# Altium PCB SixAxR.PcbDoc
Units mm, origin at the board's own origin, x right, y up, seen from the top; angles counter-clockwise.
Board outline 30 x 35 mm, 4 copper layers (Component Side, GND, +3.3, Solder Side), stack 0.844 mm thick; 99 components, 58 nets, 317 pads, 149 vias.
Unrouted connection lines stored in the file: 7.
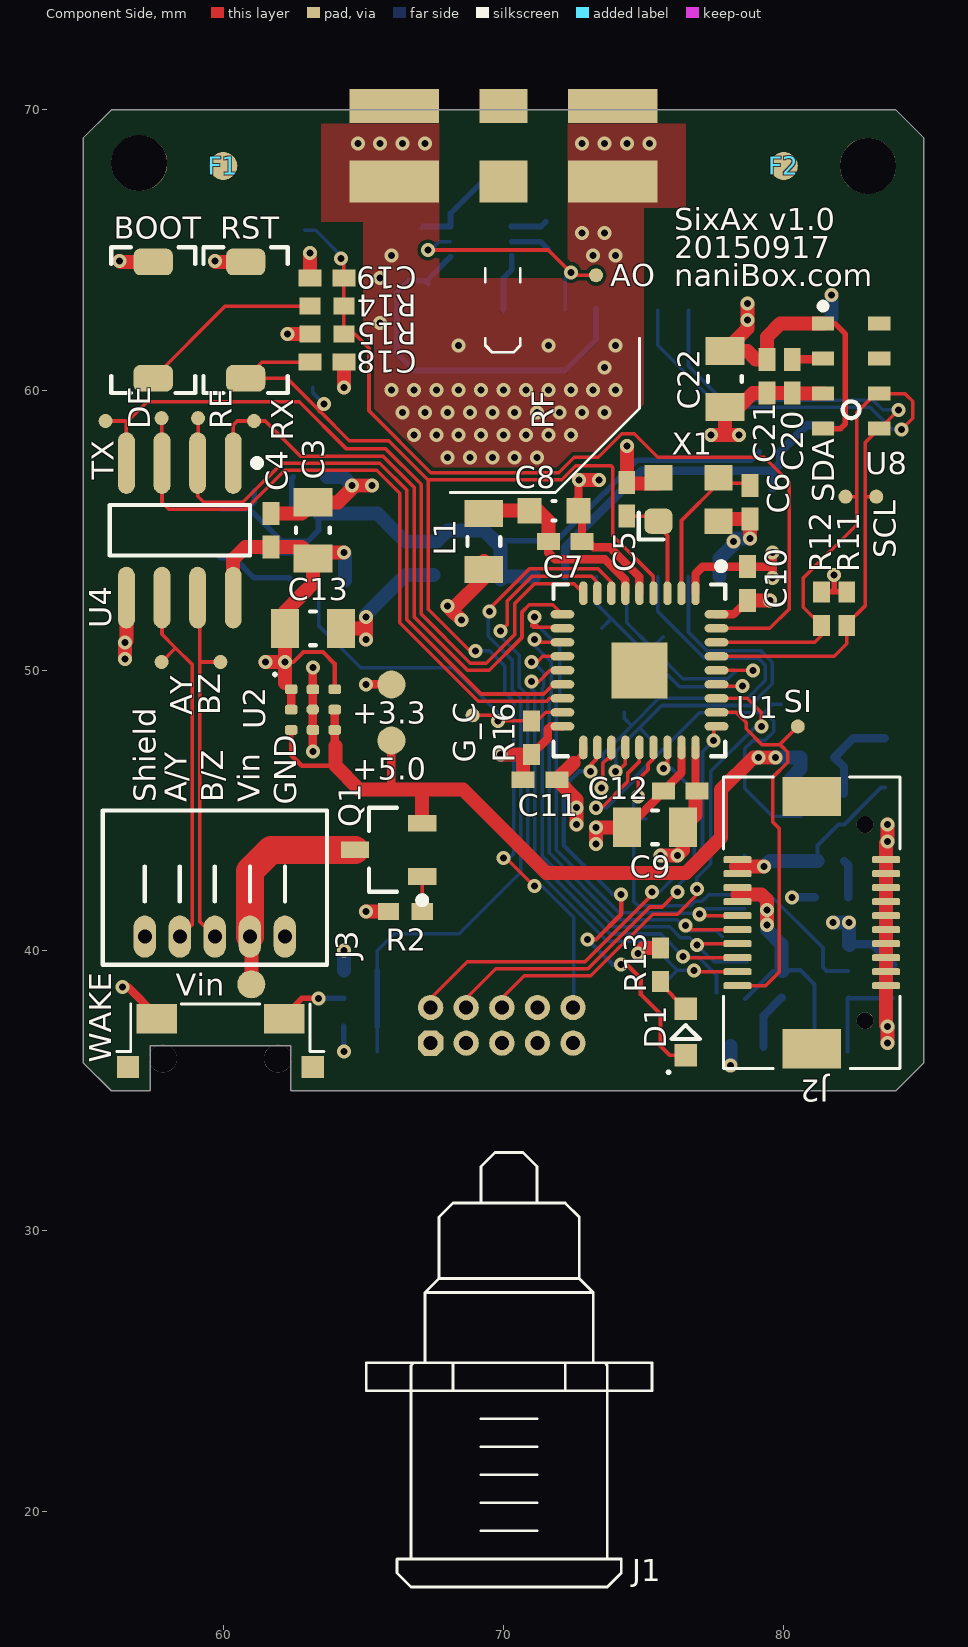
[diagram p0: Component Side view]
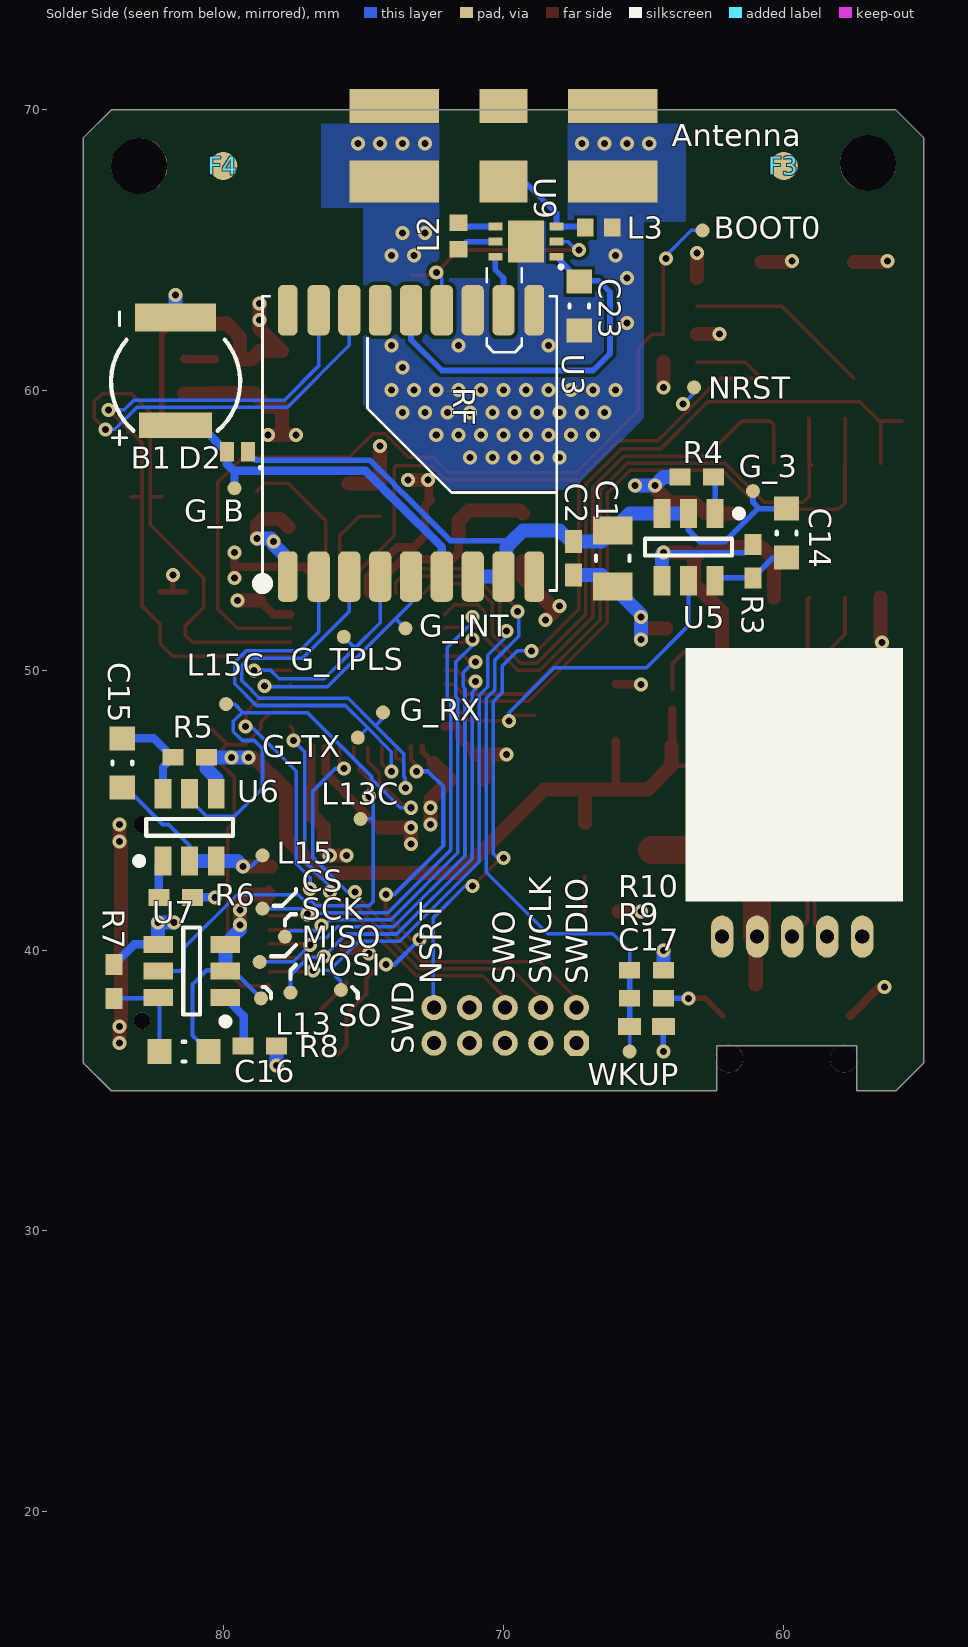
[diagram p1: Solder Side view, seen from below]
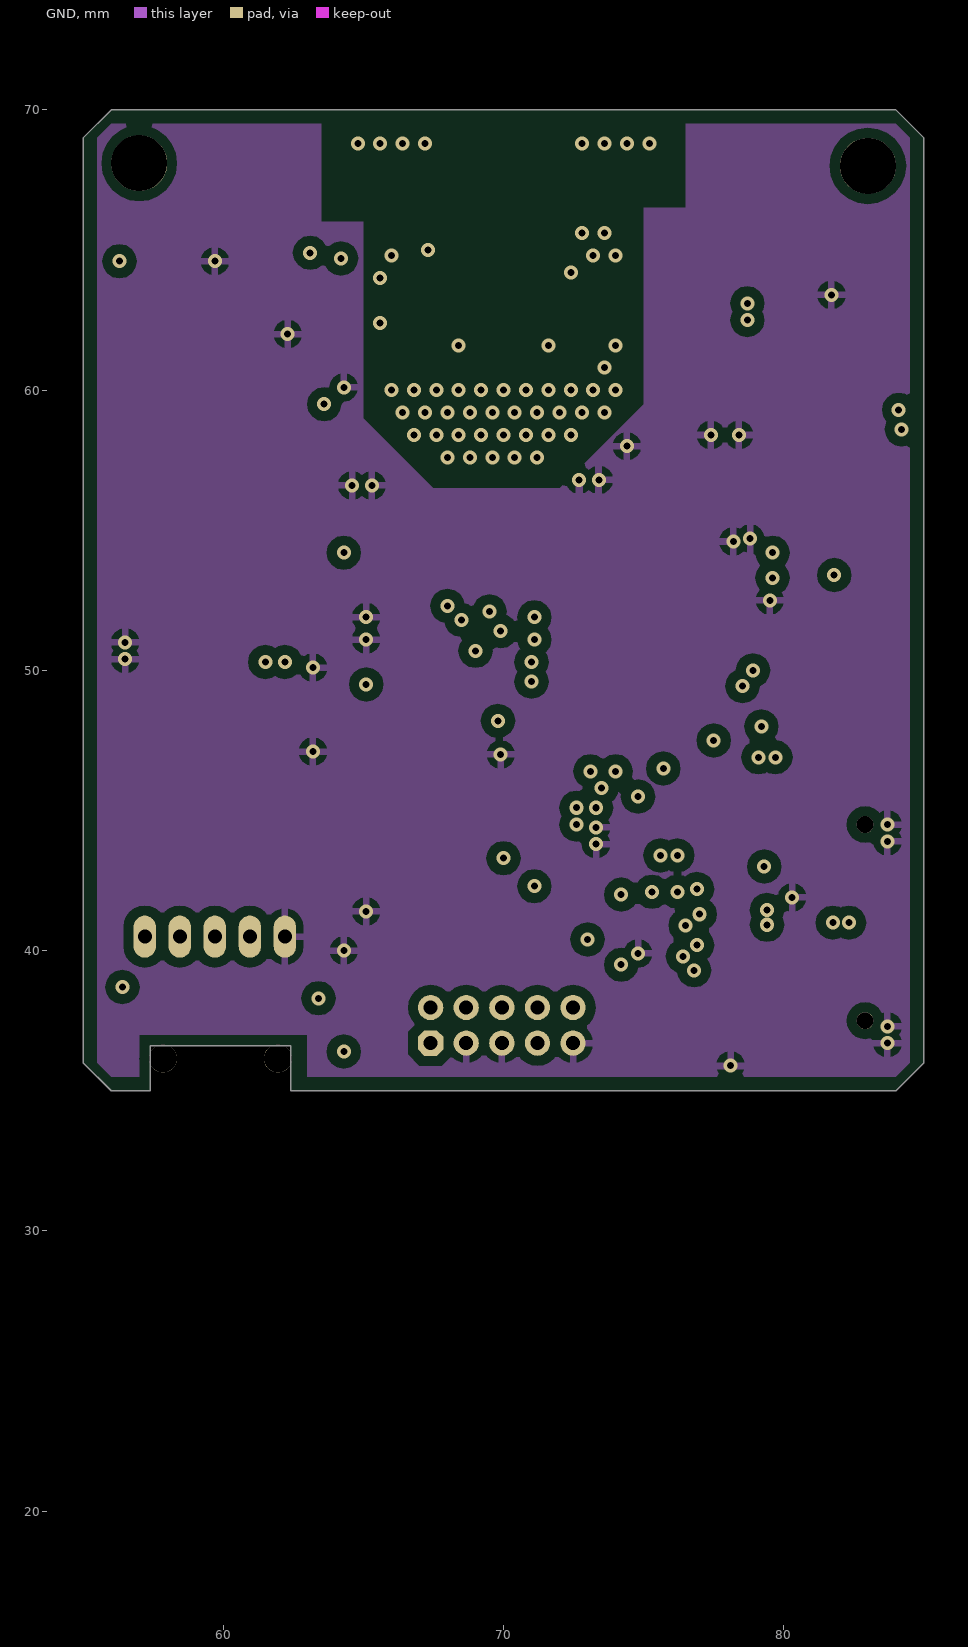
[diagram p2: GND]
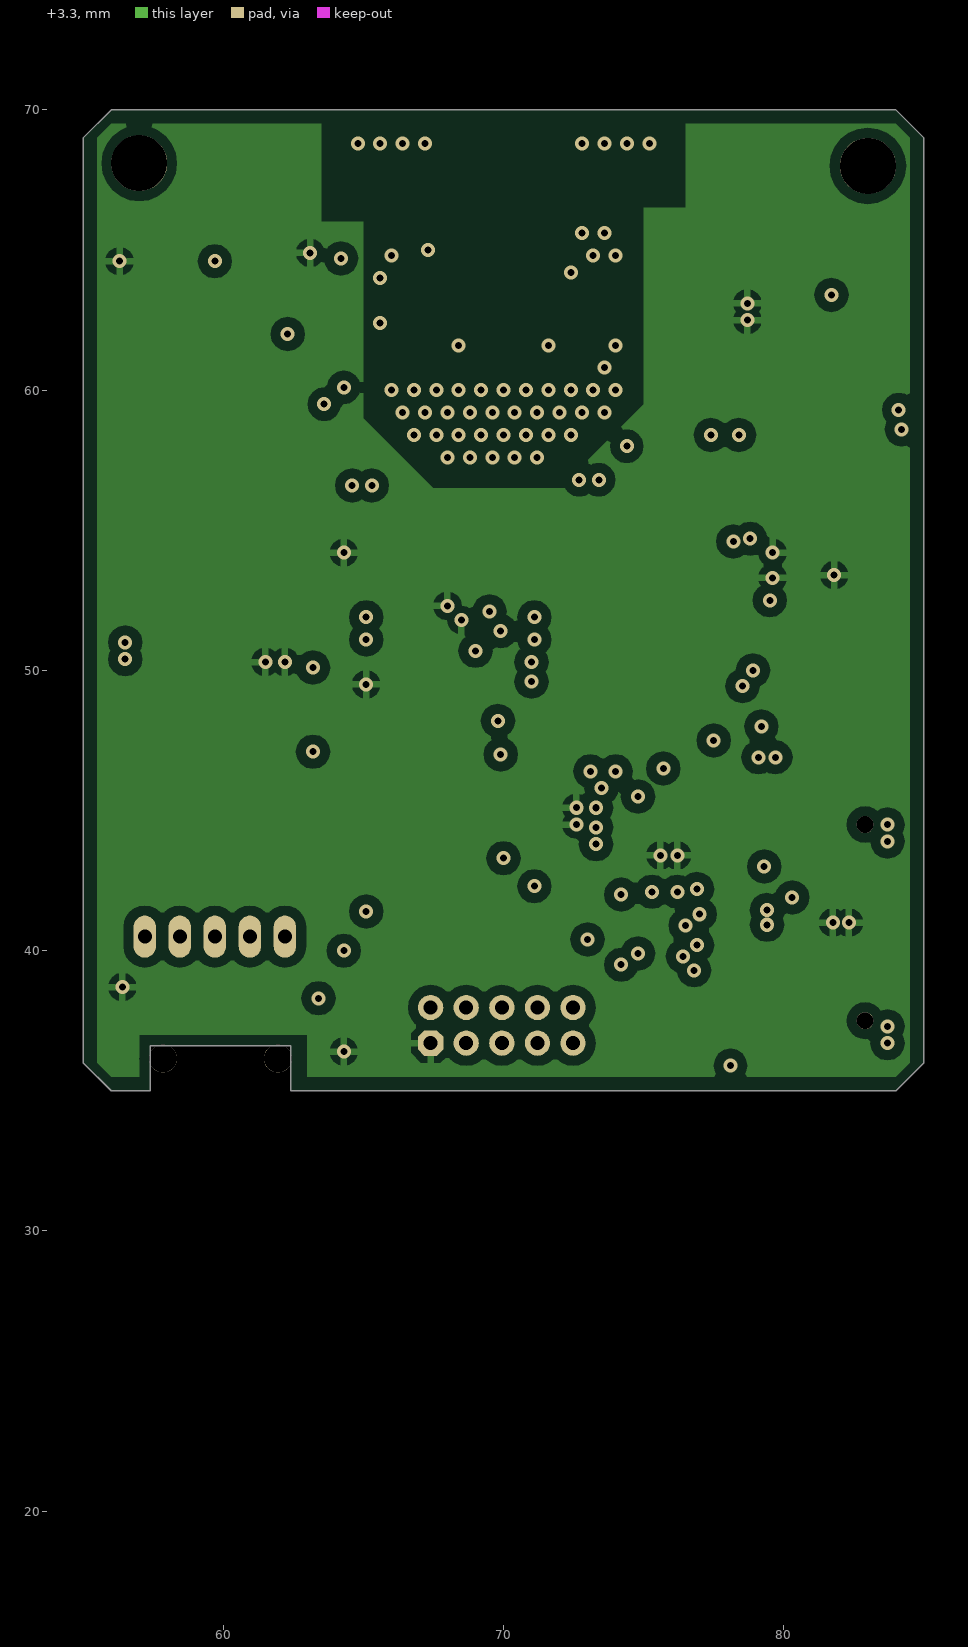
[diagram p3: +3.3]

## Layer stack, top to bottom
Top Solder: solder mask 0.0102, Solder Resist, Dk 3.5
Component Side: signal copper 0.0356
Dielectric 1: core 0.32, FR-4, Dk 4.8
GND: signal copper 0.036
Dielectric 3: prepreg 0.127, FR-4, Dk 4.2
+3.3: signal copper 0.036
Dielectric 4: core 0.254, FR-4, Dk 4.2
Solder Side: signal copper 0.0356
Bottom Solder: solder mask 0.0102, Solder Resist, Dk 3.5

## Board outline
55,69 56,70 62.3,70 63.8,70 76.2,70 77.7,70 84,70 85,69 85,36 84,35 62.4,35 62.4,36.6 57.4,36.6 57.4,35 56,35 55,36

## Design rules (kind name [scope] priority, off if disabled: settings)
Clearance Clearance_2 [InNamedPolygon('GND_L02_P006')] p1: gap=0.35
Clearance Clearance_1 [InNamedPolygon('+3.3_L03_P010')] p2: gap=0.35
Clearance [All] p3: gap=0.127
HoleSize [All] p1: absolutevalues=TRUE maxlimit=3 minlimit=0.2 maxpercent=80.000 minpercent=20.000
MinimumSolderMaskSliver [All] p1: minsoldermaskwidth=0.127
PlaneClearance [All] p1: clearance=0.5
PlaneConnect [All] p1: planeconnectstyle=Relief reliefexpansion=0.5 reliefentries=4 reliefconductorwidth=0.25 reliefairgap=0.25
PolygonConnect PolygonConnect_2 [All vs IsNamedPolygon('GND_RF_L01_P004')] p1: connectstyle=Direct reliefconductorwidth=0.254 reliefentries=4 polygonreliefangle="90 Angle" airgapwidth=0.254
PolygonConnect PolygonConnect_1 [All vs IsNamedPolygon('GND_RF_L04_P002')] p2: connectstyle=Direct reliefconductorwidth=0.254 reliefentries=4 polygonreliefangle="90 Angle" airgapwidth=0.254
PolygonConnect [All] p3: connectstyle=Relief reliefconductorwidth=0.25 reliefentries=4 polygonreliefangle="90 Angle" airgapwidth=0.25
RoutingCorners [All] p1: cornerstyle=45-Degree minsetback=2 maxsetback=2
RoutingVias [All] p1: holewidth=0.3 width=0.5 viastyle="Through Hole" minholewidth=0.2 minwidth=0.5 maxholewidth=0.5 maxwidth=0.7
SilkToSilkClearance [All] p1: silktosilkclearance=0.127
SilkToSolderMaskClearance [IsPad] p1: minsilkscreentomaskgap=0.127 clearancetoexposedcopper=TRUE
SolderMaskExpansion [All] p1: expansion=0.1
Width Width_POWERS [InNetClass('POWERS')] p1: maxlimit=1 minlimit=0.15 preferedwidth=0.5
Width [All] p2: maxlimit=0.3 minlimit=0.127 preferedwidth=0.15
23 further rules are at their usual default settings.

## Classes and differential pairs
net class POWERS: +3.3 +3.3_GPS +3.3_L1 +3.3A +5.0 +5.0_L1 GND VIN

## Components (designator, comment, footprint, x,y, rotation, side; value= is the part's Value field where it differs from the comment)
+3.3 "TEST" "TEST_1.0mm, SMD" 66,49.5 r90 top
+5.0 "TEST" "TEST_1.0mm, SMD" 66,47.5 r90 top
Antenna "MWSL1252" "MWSL1252 - Vertical - SMALLER" 70,68.4 r180 bottom
AO "TEST" "TEST_0.5mm, SMD" 73.3,64.1 r90 top
AY "TEST" "TEST_0.5mm, SMD" 57.8,50.3 r0 top
B1 "PAS409HR-VE5R" PAS409HR-VE5R 81.7,60.3 r90 bottom
BOOT "TL1015AF160QG" TL1015AF160QG 57.5,62.5 r270 top
BOOT0 "TEST" "TEST_0.5mm, SMD" 62.9,65.7 r90 bottom
BZ "TEST" "TEST_0.5mm, SMD" 59.9,50.3 r0 top
C1 "CL21A475KAQNNNE" "CAP 0805" 66.1,54 r90 bottom
C2 "CL05B104KO5NNNC" "CAP 0402" 67.5,54 r90 bottom
C3 "CL21A475KAQNNNE" "CAP 0805" 63.2,55 r270 top
C4 "CL05B104KO5NNNC" "CAP 0402" 61.7,55 r270 top
C5 "GRM1555C1E180JA01D" "CAP 0402" 74.4,56.102 r270 top
C6 "GRM1555C1E180JA01D" "CAP 0402" 78.8,56 r90 top
C7 "CL05B103KB5NNNC" "CAP 0402" 72.2,54.6 r180 top
C8 "TMK107B7105KA-T" "CAP 0603" 71.8,55.7 r180 top
C9 "CL21A475KAQNNNE" "CAP 0805" 75.4,44.4 r0 top
C10 "CL05B104KO5NNNC" "CAP 0402" 78.7,53.1 r90 top
C11 "CL05B104KO5NNNC" "CAP 0402" 71.3,46.1 r0 top
C12 "CL05B104KO5NNNC" "CAP 0402" 76.3,45.7 r0 top
C13 "CL21A475KAQNNNE" "CAP 0805" 63.2,51.5 r180 top
C14 "CL10A105KA8NNNC" "CAP 0603" 59.9,54.9 r270 bottom
C15 "CL10A105KA8NNNC" "CAP 0603" 83.6,46.7 r90 bottom
C16 "CL10A105KA8NNNC" "CAP 0603" 81.4,36.4 r0 bottom
C17 "CL05B103KB5NNNC" "CAP 0402" 64.9,37.3 r0 bottom
C18 "CL05A104KA5NNNC" "CAP 0402" 63.7,61 r180 top
C19 "CL05B103KB5NNNC" "CAP 0402" 63.7,64 r0 top
C20 "CL05A104KA5NNNC" "CAP 0402" 80.3,60.5 r270 top
C21 "CL05A104KA5NNNC" "CAP 0402" 79.4,60.5 r90 top
C22 "CL21A106KAYNNNE" "CAP 0805" 77.9,60.4 r90 top
C23 "CL10A105KA8NNNC" "CAP 0603" 67.3,63 r90 bottom
CS "TEST" "TEST_0.5mm, SMD" 78.6,41.5 r180 bottom
D1 "White" "LED 0603" 76.5,37.1 r90 top
D2 "CDSQR400B" SOD-923F 79.5,57.8 r0 bottom
DE "TEST" "TEST_0.5mm, SMD" 57.8,59 r0 top
F1 "" Fiducial_1mm 60,68 r0 top
F2 "" Fiducial_1mm 80,68 r0 top
F3 "" Fiducial_1mm 60,68 r180 bottom
F4 "" Fiducial_1mm 80,68 r180 bottom
G_3 "TEST" "TEST_0.5mm, SMD" 61.1,56.4 r90 bottom
G_B "TEST" "TEST_0.5mm, SMD" 79.6,56.5 r90 bottom
G_C "TEST" "TEST_0.5mm, SMD" 68.9,48.4 r90 top
G_INT "TEST" "TEST_0.5mm, SMD" 73.5,51.5 r0 bottom
G_RX "TEST" "TEST_0.5mm, SMD" 74.3,48.5 r0 bottom
G_TPLS "TEST" "TEST_0.5mm, SMD" 75.7,51.2 r0 bottom
G_TX "TEST" "TEST_0.5mm, SMD" 75.2,47.6 r0 bottom
J1 "EGG.00.304.CLL" EGG.00.304.CLL 70.2,17.3 r270 top
J2 "DF17(3.0)-20DS-0.5V(57)" DF17(3.0)-20DS-0.5V(57) 81,41 r90 top locked
J3 "53048-0510" "PicoBlade, 53048-0510" 59.7,40.5 r0 top
L1 "MI0805K400R-10" "IND 0805" 69.3,54.6 r90 top
L2 "LQW15AN8N2J00D" "IND 0402" 71.6,65.5 r270 bottom
L3 "LQW15AN9N1J00D" "IND 0402" 66.6,65.8 r0 bottom
L13 "TEST" "TEST_0.5mm, SMD" 78.65,38.3 r180 bottom
L13C "TEST" "TEST_0.5mm, SMD" 75.1,44.7 r90 bottom
L15 "TEST" "TEST_0.5mm, SMD" 78.6,43.4 r90 bottom
L15C "TEST" "TEST_0.5mm, SMD" 79.9,48.8 r90 bottom
MISO "TEST" "TEST_0.5mm, SMD" 78.7,39.6 r90 bottom
MOSI "TEST" "TEST_0.5mm, SMD" 77.6,38.5 r90 bottom
NRST "TEST" "TEST_0.5mm, SMD" 63.2,60.1 r90 bottom
Q1 "PMV48XP,215" SOT23-3 65.9,43.6 r180 top
R2 "P311-1.00KLRTR-ND" "RES 0402" 66.5,41.4 r0 top
R3 "P311-10.0KLRTR-ND" "RES 0402" 61.1,53.9 r90 bottom
R4 "P311-1.00KLRTR-ND" "RES 0402" 63.1,56.9 r180 bottom
R5 "P311-10.0KLRTR-ND" "RES 0402" 81.2,46.9 r180 bottom
R6 "P311-1.00KLRTR-ND" "RES 0402" 81.7,41.9 r0 bottom
R7 "P311-10.0KLRTR-ND" "RES 0402" 83.9,38.9 r90 bottom
R8 "P311-1.00KLRTR-ND" "RES 0402" 78.7,36.6 r0 bottom
R9 "P311-1.00KLRTR-ND" "RES 0402" 64.9,38.3 r180 bottom
R10 "P311-100KLRTR-ND" "RES 0402" 64.9,39.3 r0 bottom
R11 "P311-10.0KLRTR-ND" "RES 0402" 82.25,52.2 r90 top
R12 "P311-10.0KLRTR-ND" "RES 0402" 81.35,52.2 r90 top
R13 "P311-1.00KLRTR-ND" "RES 0402" 75.6,39.5 r90 top
R14 "P311-1.00KLRTR-ND" "RES 0402" 63.7,63 r180 top
R15 "P311-100KLRTR-ND" "RES 0402" 63.7,62 r0 top
R16 "P311-100KLRTR-ND" "RES 0402" 71,47.6 r270 top
RE "TEST" "TEST_0.5mm, SMD" 59.1,59 r0 top
RST "TL1015AF160QG" TL1015AF160QG 60.8,62.5 r270 top
RX "TEST" "TEST_0.5mm, SMD" 61.1,58.9 r0 top
SCK "TEST" "TEST_0.5mm, SMD" 77.8,40.5 r90 bottom
SCL "TEST" "TEST_0.5mm, SMD" 83.3,56.2 r0 top
SDA "TEST" "TEST_0.5mm, SMD" 82.2,56.2 r0 top
SI "TEST" "TEST_0.5mm, SMD" 80.5,48 r0 top
SO "TEST" "TEST_0.5mm, SMD" 75.8,38.6 r180 bottom
SWD "CORTEX_DEBUG" "H_05x02 - 1.27mm" 67.4,36.7 r0 bottom
TX "TEST" "TEST_0.5mm, SMD" 55.8,58.9 r0 top
U1 "STM32F103TxUx" "QFN36 - 0.5mm - NO THERMAL VIAS" 74.85,50.002 r270 top
U2 "LXDC2UR30A-143" "BGA - 9 - LXDC2UR" 63.2,48.6 r0 top
U3 "uBlox MAX7" "uBlox MAX7" 73.3,58.1 r270 bottom locked
U4 "ISL83485IBZ" SOIC8 58.45,55 r270 top
U5 "TPS27081ADDCR" SOT23-6 63.4,54.4 r270 bottom
U6 "TPS27081ADDCR" SOT23-6 81.2,44.4 r90 bottom
U7 "TPS27081ADDCR" SOT23-6 81.125,39.275 r0 bottom
U8 "MPL3115A2R1" MPL3115A2R1 82.4,60.5 r0 top
U9 "BGM1043N7" TSNP-7-10 69.2,65.3 r90 bottom
Vin "TEST" "TEST_1.0mm, SMD" 61,38.8 r0 top
WAKE "EVQ-P44B3M" EVQ-P44B3M 59.9,35 r0 top
WKUP "TEST" "TEST_0.5mm, SMD" 65.5,36.4 r90 bottom
X1 "403C11A12M00000" XTAL_3.2x2.5 76.6,56.1 r0 top

## Footprints (in the part's own frame and the unit in brackets; to place one, negate y for a bottom-side part, rotate by r counter-clockwise, add the part's x,y. Pads: shape width x height; smd on the part's side, far side on the other; paste and mask are expansions set on the pad)
"BGA - 9 - LXDC2UR" [mm] "BGA, 9-Leads, Body 2.50x2.30mmx1.20mm, Pitch 0.72mm For MuRata LXDC2UR Series"
  rrect50% 0.45x0.35 smd: 1(0.775,0.725) 2(0,0.725) 3(-0.775,0.725) 4(-0.775,0) 5(-0.775,-0.725) 6(0,-0.725) 7(0.775,-0.725) 8(0.775,0)
  oct 0.45x0.35 smd: 9(0,0)
  silkscreen extent -1.4,1.21 -1.3,1.3, body extent -1.25,-1.15 1.25,1.15, height 1.2
"CAP 0402" [mm] "Chip Capacitor, 2-Leads, Body 1.00x0.50mm, IPC Medium Density"
  rect 0.82x0.6 smd: 1(-0.6,0) 2(0.6,0)
  body extent -0.5,-0.25 0.5,0.25, height 0.5
"CAP 0603" [mm] "Chip Capacitor, 2-Leads, Body 1.60x0.80mm, IPC Medium Density"
  rect 0.85x0.9 smd: 1(-0.875,0) 2(0.875,0)
  silkscreen extent -0.05,-0.35 0.05,0.35, body extent -0.8,-0.4 0.8,0.4, height 0.8
"CAP 0805" [mm] "Chip Capacitor, 2-Leads, Body 2.00x1.25mm, IPC Medium Density"
  rect 1x1.4 smd: 1(-1,0) 2(1,0)
  silkscreen extent -0.1,-0.6 0.1,0.6, body extent -1,-0.63 1,0.63, height 1.25
DF17(3.0)-20DS-0.5V(57) [mm] "B2B, 20 POS RCPT"
  rrect50% 0.25x1 smd: 1(-2.25,-2.65) 2(-1.75,-2.65) 3(-1.25,-2.65) 4(-0.75,-2.65) 5(-0.25,-2.65) 6(0.25,-2.65) 7(0.75,-2.65) 8(1.25,-2.65) 9(1.75,-2.65) 10(2.25,-2.65) 11(2.25,2.65) 12(1.75,2.65) 13(1.25,2.65) 14(0.75,2.65) 15(0.25,2.65) 16(-0.25,2.65) 17(-0.75,2.65) 18(-1.25,2.65) 19(-1.75,2.65) 20(-2.25,2.65)
  round 0.6 hole 0.6 unplated: 25(-3.5,-1.9) 26(3.5,-1.9)
  rect 1.4x2.1 smd: S0(-4.5,0) S1(4.5,0)
  silkscreen extent -5.2,-3.15 5.2,3.15, body extent -5,-2.85 5,2.85, height 3.5
EGG.00.304.CLL [mm]
  silkscreen extent -15.5,-5.1 0,5.1
EVQ-P44B3M [mm] "Switch, Tactile, 4.7x3.5mm Right Angl Force=2.4N H=3.0mm"
  rect 1.45x1.05 smd: 1(-2.275,2.575) 2(2.275,2.575)
  rect 0.8x0.8 smd: SHIELD(-3.3,0.85) SHIELD(3.3,0.85)
  round 1 hole 1 unplated: ""(-2.05,1.15) ""(2.05,1.15)
  silkscreen extent -3.7,1.4 3.7,3.1, body extent -3.1,-0.5 3.1,2.5, height 1.36
Fiducial_1mm [mm]
  round 1 smd paste+0 mask+0.25: 1(0,0)
"H_05x02 - 1.27mm" [mm]
  oct 0.9x0.9 hole 0.5: 1(0,0)
  round 0.9 hole 0.5: 2(0,-1.27) 3(1.27,0) 4(1.27,-1.27) 5(2.54,0) 6(2.54,-1.27) 7(3.81,0) 8(3.81,-1.27) 9(5.08,0) 10(5.08,-1.27)
"IND 0402" [mm] "Chip Inductor, 2-Leads, Body 1.00x0.50mm, IPC Medium Density"
  rect 0.59x0.64 smd: 1(-0.48,0) 2(0.48,0)
  body extent -0.5,-0.25 0.5,0.25, height 0.5
"IND 0805" [mm] "Chip Inductor, 2-Leads, Body 2.00x1.25mm, IPC Medium Density"
  rect 0.97x1.37 smd: 1(-0.995,0) 2(0.995,0)
  silkscreen extent -0.15,-0.59 0.15,0.59, body extent -1,-0.63 1,0.63, height 0.9
"LED 0603" [mm] "Chip LED, 2-Leads, Body 1.60x0.80mm, IPC Medium Density"
  rect 0.8x0.8 smd: A(-0.825,0) K(0.825,0)
  silkscreen extent -1.49,-0.5 0.25,0.66, body extent -0.8,-0.4 0.8,0.4, height 0.75
MPL3115A2R1 [mm] "Barometric Pressure Sensor, SMD"
  rect 0.8x0.5 smd: 1(-1,1.875) 2(-1,0.625) 3(-1,-0.625) 4(-1,-1.875) 5(1,1.875) 6(1,0.625) 7(1,-0.625) 8(1,-1.875)
  silkscreen extent -1.1,-1.5 0.3,2.6, body extent -1.5,-2.5 1.5,2.5, height 1.1
"MWSL1252 - Vertical - SMALLER" [mm] "GPS Antenna, Passive, SMD"
  rect 3.2x1.5 smd far side: GND(-3.9,-0.95) GND(3.9,-0.95)
  rect 3.2x1.5 smd: GND(-3.9,-0.95) GND(3.9,-0.95)
  rect 3.2x1.2 smd far side: GND(-3.9,1.74) GND(3.9,1.74)
  rect 3.2x1.2 smd: GND(-3.9,1.74) GND(3.9,1.74)
  rect 1.7x1.5 smd far side: SIG(0,-0.95)
  rect 1.7x1.5 smd: SIG(0,-0.95)
  rect 1.7x1.2 smd far side: SIG(0,1.74)
  rect 1.7x1.2 smd: SIG(0,1.74)
  body extent -6.65,-6.24 6.65,7.06, height 22.61
PAS409HR-VE5R [mm] "Supercap, 3.3V, 0.03F"
  rect 0.9x2.6 smd: +(-1.55,0)
  rect 1x2.9 smd: -(2.3,0)
  silkscreen extent -2.25,-2.3 2.5,2.3, body extent -2.4,-2.4 2.4,2.4, height 1.55
"PicoBlade, 53048-0510" [mm] "PicoBlade, Header, R/A, PTH, 5 Pos, 1.25mm Pitch"
  oval 0.8x1.5 hole 0.5: 1(2.5,0) 2(1.25,0) 3(0,0) 4(-1.25,0) 5(-2.5,0)
  silkscreen extent -4,-1 4,4.5, body extent -4,-1.05 4,4.45, height 3.51
"QFN36 - 0.5mm - NO THERMAL VIAS" [mm] "QFN, 36-Leads, Body 6.00x6.00mm, Pitch 0.50mm, IPC Medium Density"
  oval 0.85x0.3 smd: 1(-2.75,2) 2(-2.75,1.5) 3(-2.75,1) 4(-2.75,0.5) 5(-2.75,0) 6(-2.75,-0.5) 7(-2.75,-1) 8(-2.75,-1.5) 9(-2.75,-2) 19(2.75,-2) 20(2.75,-1.5) 21(2.75,-1) 22(2.75,-0.5) 23(2.75,0) 24(2.75,0.5) 25(2.75,1) 26(2.75,1.5) 27(2.75,2)
  oval 0.3x0.85 smd: 10(-2,-2.75) 11(-1.5,-2.75) 12(-1,-2.75) 13(-0.5,-2.75) 14(0,-2.75) 15(0.5,-2.75) 16(1,-2.75) 17(1.5,-2.75) 18(2,-2.75) 28(2,2.75) 29(1.5,2.75) 30(1,2.75) 31(0.5,2.75) 32(0,2.75) 33(-0.5,2.75) 34(-1,2.75) 35(-1.5,2.75) 36(-2,2.75)
  rect 2x2 smd paste-1: 37(0,0)
  rrect50% 0.7x0.7 on Top Paste: ThermalPaste(-0.5,0.5) ThermalPaste(-0.5,-0.5) ThermalPaste(0.5,0.5) ThermalPaste(0.5,-0.5)
  silkscreen extent -3.84,-3.07 3.07,3.07, body extent -3.07,-3.07 3.07,3.07, height 1
"RES 0402" [mm] "Chip Resistor, 2-Leads, Body 1.00x0.50mm, IPC Medium Density"
  rect 0.75x0.6 smd: 1(-0.6,0) 2(0.6,0)
  body extent -0.5,-0.25 0.5,0.25, height 0.35
SOD-923F [mm] "SOD-923F / 0402, Chip Diode, 2-Leads, Body 1.00x0.60mm, IPC Medium Density"
  rect 0.5x0.7 smd: 1(-0.375,0) 2(0.375,0)
  silkscreen extent -0.89,0.51 -0.79,0.61, body extent -0.53,-0.33 0.53,0.32, height 0.55
SOIC8 [mm] "SOIC, 8-Leads, Body 4.90x3.90mm, Pitch 1.27mm, IPC Medium Density"
  oval 2.2x0.6 smd: 1(-2.4,1.905) 2(-2.4,0.635) 3(-2.4,-0.635) 4(-2.4,-1.905) 5(2.4,-1.905) 6(2.4,-0.635) 7(2.4,0.635) 8(2.4,1.905)
  silkscreen extent -2.52,-2.5 0.9,2.88, body extent -2,-2.5 2,2.5, height 1.76
SOT23-3 [mm] "SOT23, 3-Leads, Body 2.90x2.45mm, Pitch 0.95mm, IPC Medium Density"
  rect 1x0.6 smd: 1(-1.2,0.95) 2(-1.2,-0.95) 3(1.2,0)
  silkscreen extent -1.33,-1.5 0.7,1.92, body extent -0.7,-1.5 0.7,1.5, height 1.1
SOT23-6 [mm] "SOT23, 6-Leads, Body 2.90x2.80mm, Pitch 0.95mm, IPC Medium Density"
  rect 1.05x0.6 smd: 1(-1.2,0.95) 2(-1.2,0) 3(-1.2,-0.95) 4(1.2,-0.95) 5(1.2,0) 6(1.2,0.95)
  silkscreen extent -1.32,-1.55 0.3,1.92, body extent -0.87,-1.52 0.87,1.53, height 1.1
"TEST_0.5mm, SMD" [mm]
  round 0.5 smd: 0(0,0)
"TEST_1.0mm, SMD" [mm]
  round 1 smd: 0(0,0)
TL1015AF160QG [mm] "Switch, Tactile, 4x3mm"
  rrect50% 0.95x1.4 smd: 1(-2.075,0) 2(2.075,0)
  silkscreen extent -2.6,-1.5 2.6,1.5, body extent -1.95,-1.45 1.95,1.45, height 2
TSNP-7-10 [mm]
  rect 0.28x0.5 smd paste-0.14: 1(-0.54,-1.09) 2(0,-1.09) 3(0.54,-1.09) 4(0.54,1.08) 5(0,1.08) 6(-0.54,1.09)
  rect 1.5x1.28 smd paste-0.64: 7(0,0)
  oval 0.28x0.5 on Bottom Paste: PASTE(-0.57,-0.3) PASTE(-0.57,0.3) PASTE(-0.54,-1.1) PASTE(-0.54,1.1) PASTE(-0.19,-0.3) PASTE(-0.19,0.3) PASTE(0,-1.1) PASTE(0,1.1) PASTE(0.19,-0.3) PASTE(0.19,0.3) PASTE(0.54,-1.1) PASTE(0.54,1.1) PASTE(0.57,-0.3) PASTE(0.57,0.3)
  silkscreen extent -0.95,-1.3 -0.85,-1.2, body extent -0.85,-1 0.85,0.97, height 0.73
"uBlox MAX7" [mm]
  rrect50% 1.8x0.7 smd: 1(4.75,-4.4) 9(4.75,4.4) 10(-4.75,4.4) 18(-4.75,-4.4)
  rrect50% 1.8x0.8 smd: 2(4.75,-3.3) 3(4.75,-2.2) 4(4.75,-1.1) 5(4.75,0) 6(4.75,1.1) 7(4.75,2.2) 8(4.75,3.3) 11(-4.75,3.3) 12(-4.75,2.2) 13(-4.75,1.1) 14(-4.75,0) 15(-4.75,-1.1) 16(-4.75,-2.2) 17(-4.75,-3.3)
  silkscreen extent -6.25,-5.43 5.25,5.2, body extent -5.03,-4.99 4.67,5.11, height 2.47
XTAL_3.2x2.5 [mm]
  rrect50% 1x0.9 smd: 1(-1.075,-0.775)
  rect 1x0.9 smd: 2(1.075,-0.775) 3(1.075,0.775) 4(-1.075,0.775)
  silkscreen extent -1.78,-1.43 -0.9,-0.48, body extent -1.6,-1.25 1.6,1.25, height 0.8

## Part data
Antenna: "GPS Antenna, Passive, SMD"
B1: "Super Cap, 3.3V, 0.03F"
BOOT RST: "Switch, Tactile, SMD"
C1 C3 C9 C13: "MLCC, 4.7uF, 0805, 10%, 25V, X5R"
C2 C4 C10 C11 C12: "MLCC, 100nF, 0402, 10%, 16V, X7R"
C5 C6: "MLCC, 18pF, 0402, 5%, 25V, C0G"
C7 C17 C19: "MLCC, 10nF, 0402, 10%, 50V, X7R"
C8: "MLCC, 1uF, 0603, 10%, 25V"
C14 C15 C16 C23: "MLCC, 1uF, 0603, 10%, 25V, X5R"
C18 C20 C21: "MLCC, 100nF, 0402, 10%, 25V, X5R"
C22: "MLCC, 10uF, 0805, 10%, 25V, X5R"
D1: library part 1608SWD-04, "LED, White, 0603"
D2: "DIODE, Switching, Low Leakage, 90V, 100mA"
F1 F2 F3 F4: library part "Fiducial 1mm"
J1: "LEMO 00, 4-pin"
J2: "Conn, B2B, 20 Pos, RCPT"
J3: "PicoBlade, Header, R/A, PTH, 5 Pos, 1.25mm Pitch"
L1: "IND, EMI, 40Ohm, 100MHz, 1.5A, 0805"
L2: "IND, 8.2nH, 5%, 100MHz"
L3: "IND, 9.1nH, 5%, 100MHz"
Q1: "MOSFET P-CH -20 V -3.5 A, SOT23-3"
R2 R4 R6 R8 R9 R13 R14: "RES, 0402, 1k, 1%"
R3 R5 R7 R11 R12: "RES, 0402, 10k, 1%"
R10 R15 R16: "RES, 0402, 100k, 1%"
SWD: "Cortex Debug"
U1: "MCU, ARM-based 32-bit MCU with 64  or 128 KB Flash, USB, CAN, 7 timers, 2 ADCs, 9 com. interfaces"
U2: "DC-DC 3.0Vout 600mA 2.5x2.3mm uDCDC"
U3: "GPS, u-blox 7 GPS/GNSS module"
U4: "RS-422/RS-485, 3.3V, HalfDuplex, TRN 1TX/1RX, W/SHTDN"
U5 U6 U7: "High Side Load Switch PFET 1.2V-8V 3A"
U8: "Barometric Pressure Sensor, SMD"
U9: "RF, LNA, GPS"
WAKE: "Switch, Tactile, Right Angle, Mid-Plane Mount,, SMD"
X1: "Crystal 12MHz 10pF 10ppm 3.2x2.5mm"

## Free pads (board coordinates)
  round 2 hole 2 unplated: HOLE(57,68.1) HOLE(83,68)

## Via types
v1: diameter 0.5, hole 0.25, Component Side to Solder Side, tented both sides, 149 vias

## Nets (pads, with @x,y where several pads share a name; then routed paths per layer and width w, separated by ;. In a path a pad name is that pad's centre, name@x,y a point inside that pad or via, vN(x,y) a via of type N, cw(c..) or ccw(c..) an arc to the next point about the centre after c; other vN are vias at no path point)
+3.3: +3.3.0 BOOT.1 C3.2 C4.2 C9.2 C10.2 C11.2 C12.2 C13.2 C17.1 C19.1 C21.2 C22.2 L1.1 R3.2 R7.2 R11.2 R12.2 SWD.1 U1.1 U1.19 U1.27 U2.1 U2.3 U2.4 U4.8 U5.4 U7.4 U8.1 U8.4 WAKE.1 | length 57.6
  Component Side w0.15: v1(62.2,50.3) 62.5,50.3 62.857,50.657 63.557,50.657 63.975,50.239 U2.1
  Component Side w0.2: 72.5,46.7 72.9,47.1 U1.19@72.9,47.3 ; C12.2@76.85,45.75 C12.2 ; R12.2 81.8,52.8 ; U8.4 82.025,58.625 82.2,58.8 82.2,62 81.825,62.375 U8.1 ; v1(81.8,53.4) 81.8,52.8 ; R11.2 81.8,52.8
  Component Side w0.3: v1@56.525,38.675 56.425,38.675 v1(56.4,38.7) 56.6,38.7 WAKE.1@57.625,37.675 ; 62.2,49.55 U2.3 U2.4 ; v1(65.1,49.5) +3.3.0 ; C12.2@76.85,45.75 U1.27 ; U1.1 76.85,53.45 77.1,53.7 C10.2 ; C10.2 79.5,53.7 79.6,53.6 ; v1(79.6,53.3) 79.6,53.6 ; v1(79.6,54.2) 79.6,53.6
  Component Side w0.5: v1(56.3,64.6) 56.325,64.575 BOOT.1 ; U4.8 60.355,53.955 60.8,54.4 62.8,54.4 C3.2 ; v1(61.5,50.3) v1(62.2,50.3) ; 62.2,49.55 v1(62.2,50.3) ; C19.1 v1(63.1,64.9) ; v1(64.3,54.2) 63.4,54.2 C3.2 ; v1(68,52.3) v1@68.1,52.2 ; v1(68.5,51.8) v1@68.1,52.2 ; L1.1@69.3,53.905 69.3,53.3 68.2,52.2 v1@68.1,52.2 ; 72.5,46.7 C11.2 72.6,45.4 v1(72.6,45.1) v1(72.6,44.5) ; v1(75.6,43.4) v1(76.2,43.4) 76.4,43.6 C9.2 76.85,44.85 C12.2@76.85,45.75 ; v1(78.7,63.1) v1(78.7,62.5) 78.7,62.2 C22.2 78.7,61.4 79,61.1 C21.2 79.4,61.9 79.875,62.375 U8.1 ; v1(62.2,50.3) C13.2 62.2,52.1 62.8,52.7 63.2,53.1 C3.2
  Solder Side w0.2: R3.2 61.4,54.2 v1(64.3,54.2) ; v1(64.3,36.4) C17.1
  Solder Side w0.3: U7.4 83.175,40.225 R7.2
  Solder Side w0.5: v1(64.3,54.2) 64.35,54.15 U5.4 ; v1(81.75,41) v1(82.325,41) U7.4 U7.4@82.35,40.2
+3.3_GPS: C1.2 C2.2 C14.1 D2.1 G_3.0 U3.7 U3.8 U5.2 U5.3 | length 26.1
  Solder Side w0.2: C14.1 60.925,55.775 62.1,54.6 63,54.6 63.4,55 U5.2 U5.2@63.4,55.796 ; 60.9,55.8 61.1,56 G_3.0 ; 69.673,54.627 71.894,54.627 73.59,56.323 73.598,56.323 73.877,56.602 73.877,56.61 74.767,57.5 78.825,57.5 D2.1
  Solder Side w0.5: U5.2 U5.3 65.5,55.6 C1.2 66.5,54.6 C2.2 67.6,54.6 68,55 69.3,55 69.673,54.627 69.9,54.4 69.9,53.25 U3.8 U3.7
+3.3_GPS_VBKP: B1.+ D2.2 G_B.0 U3.6 | length 13.2
  Solder Side w0.3: U3.6 72.2,54.4 73.746,55.946 73.754,55.946 74.254,56.446 74.254,56.454 74.923,57.123 79.577,57.123 79.6,57.1 ; G_B.0 79.6,57.1 ; B1.+ 80.825,58.75 D2.2 79.875,57.375 79.6,57.1
+3.3_L1: C16.1 J2.13 J2.14 L13.0 U7.2 U7.3 | length 10.1
  Component Side w0.2: J2.14 78.35,42 J2.13
  Component Side w0.5: 78.35,42 79.2,42 79.4,41.8 v1(79.4,41.45) v1(79.4,40.925)
  Solder Side w0.15: L13.0@78.625,38.275 79.625,39.275 U7.2 ; U7.2@79.925,39.3 80.6,39.3 81.1,38.8 81.1,36.975 C16.1
  Solder Side w0.5: v1(79.4,40.925) 79.4,40.75 U7.3 79.925,39.3 U7.2@79.95,39.275
+3.3A: C7.2 C8.2 L1.2 U1.6 | length 7.3
  Component Side w0.3: C7.2@71.6,54.8 71.6,54.2 71.838,53.962 73.62,53.962 74.35,53.231 U1.6
  Component Side w0.5: L1.2 69.405,55.7 C8.2 71.225,55.7 71.6,55.325 C7.2@71.6,54.8
+5.0: +5.0.0 Q1.2 R5.2 U2.5 U2.7 U2.8 U6.4 | length 30.5
  Component Side w0.15: U2.5 62.425,46.975 62.8,46.6 64,46.6
  Component Side w0.3: U2.7 63.975,47.325 64,47.3 ; U2.7@63.975,47.925 U2.8 ; 66,45.7 66,45.75 +5.0.0
  Component Side w0.5: 64,47.3 64,46.6 64.85,45.75 66,45.75 67.1,45.75 ; Q1.2 67.1,45.75 ; v1@78.913,46.9 77.763,45.75 77.763,44.03 76.506,42.773 71.527,42.773 68.55,45.75 67.1,45.75 ; v1@78.913,46.9 v1(79.1,46.9) v1(79.7,46.9)
  Solder Side w0.5: v1(79.1,46.9) v1(79.7,46.9) R5.2 80.6,46.5 80.25,46.15 U6.4
+5.0_L1: C15.1 J2.11 J2.12 L15.0 U6.2 U6.3 | length 7.7
  Component Side w0.5: 78.3,43 v1(79.3,43)
  Solder Side w0.15: L15.0 79,43 v1(79.3,43) ; U6.2 81.2,43.75 81.95,44.5 82.161,44.5 82.652,44.991 82.652,45.002 83.475,45.825 C15.1
  Solder Side w0.5: v1(79.3,43) 79.5,43.2 U6.2@81.2,43.2
\USART1_RE: RE.0 U1.15 U4.2 | length 22.8
  Component Side w0.127: U4.2@59,57.325 59.1,57.425 RE.0 ; U4.2 59.085,56.215 59.3,56 60.7,56 62.095,57.395 65.588,57.395 66.554,56.428 66.554,51.805 69.199,49.159 71.441,49.159 71.784,49.502 U1.15
ANT_ON: AO.0 U3.13 U9.2 | length 8.7
  Component Side w0.127: v1(67.3,65) 71.6,65 v1(72.4,64.2) 72.5,64.1 AO.0
  Solder Side w0.127: v1(67.3,65) 67.4,65 67.7,65.3 U9.2@68.1,65.3 ; U3.13 72.2,64 v1(72.4,64.2)
BOOT0: BOOT0.0 C19.2 R14.1 R15.2 U1.35 | length 32.4
  Component Side w0.127: v1(64.2,64.7) 64.3,64.6 C19.2@64.3,64.1 ; C19.2 R15.2 64.7,62 65.2,61.5 65.2,59.259 67.405,57.054 71.972,57.054 72.518,57.6 73.377,57.6 74.218,58.441 74.66,58.441 75.5,57.6 79.3,57.6 80.192,56.708 80.192,52.192 79.502,51.502 U1.35
  Solder Side w0.127: BOOT0.0 63.3,65.7 64.2,64.8 v1(64.2,64.7)
"DATA A/Y": AY.0 J3.4 U4.6 | length 13.5
  Component Side w0.127: AY.0 58.275,50.775 58.275,50.825 ; U4.6 57.815,51.285 58.275,50.825 ; J3.4 58.9,40.95 58.9,50.2 58.275,50.825
"DATA B/Z": BZ.0 J3.3 U4.7 | length 13.1
  Component Side w0.127: U4.7 59.154,52.531 59.154,41.046 J3.3 ; 59.175,50.275 59.2,50.3 BZ.0
GND: B1.- C1.1 C2.1 C3.1 C4.1 C5.1 C6.1 C7.1 C8.1 C9.1 C10.1 C11.1 C12.1 C13.1 C18.1 C20.2 C21.1 C22.1 J2.1 J2.2 J2.3 J2.4 J2.5 J2.6 J2.7 J2.8 J2.9 J2.10 J3.1 R2.1 R4.1 R6.1 R8.1 R10.1 R13.2 R15.1 R16.2 RST.1 SWD.3 SWD.5 SWD.9 U1.5 U1.18 U1.26 U1.36 U2.2 U2.6 U2.9 U3.1 U4.5 U8.3 X1.2 X1.4 | length 61.8
  Component Side w0.15: v1@64.6,56.5 v1(64.6,56.6)
  Component Side w0.3: v1(63.2,47.1) v1(63.2,50.1) ; R16.2 71.577,47.577 71.577,47.9 71.679,48.002 U1.18 U1.18@72.091,47.993 ; C8.1@72.6,56.075 72.8,55.875 72.8,54.8 73.211,54.389 73.796,54.389 74.85,53.335 U1.5@74.85,52.752 ; C8.1@72.675,56 72.675,56.775 v1(72.7,56.8) ; C9.1 74.445,44.4 75.7,45.655 C12.1 76.35,46.35 U1.26 ; U1.36 78.202,52.002 C10.1
  Component Side w0.5: v1(56.5,50.4) v1(56.5,51) 56.545,51.045 U4.5 ; v1(59.7,64.6) 59.725,64.575 RST.1 ; C4.1 62.8,55.6 C3.1 64.1,56 v1@64.6,56.5 ; v1(62.3,62) R15.1 ; C13.1 65.1,51.5 ; v1(64.3,60.1) C18.1 ; v1(64.6,56.6) v1(65.3,56.6) ; v1(65.1,41.4) R2.1 ; v1(65.1,51.1) 65.1,51.5 ; v1(65.1,51.9) 65.1,51.5 ; v1(69.9,47) 70.7,47 ; C11.1 70.7,47 ; R16.2 70.7,47 ; v1(72.7,56.8) v1(73.4,56.8) ; v1(73.3,43.8) v1(73.3,44.4) C9.1 ; C5.1 v1(74.4,58) ; C5.1@74.427,56.675 X1.4@75.525,56.675 ; v1(74.8,39.9) 75,40.1 R13.2 ; X1.2@77.675,55.125 77.95,55.4 78.602,55.4 78.8,55.202 v1(78.8,54.7) ; v1(78.4,58.4) v1(77.4,58.4) 77.9,58.4 C22.1 78.4,59.4 78.9,59.9 C20.2 80.325,59.875 U8.3 ; C10.1 v1(79.5,52.5) ; v1(83.7,36.7) v1(83.7,37.3) 83.65,37.35 83.65,43.85 v1(83.7,43.9) v1(83.7,44.5)
  Solder Side w0.3: v1(80.3,41.9) R6.1
  Solder Side w0.5: R4.1 64.3,56.9 v1(64.6,56.6) v1(65.3,56.6) ; R10.1 v1(64.3,40) ; v1(65.1,51.1) v1(65.1,51.9) 65.1,52 C1.1 66.5,53.4 C2.1 ; U3.1 77.7,54 78.2,54.5 v1(78.2,54.6) 78.3,54.7 v1(78.8,54.7) ; v1(78.1,35.9) R8.1 ; B1.- v1(81.7,63.4)
GND_RF: Antenna.GND C23.1 L3.1 U3.10 U3.12 U9.7
  other v1: 68,57.6 68.8,57.6 69.6,57.6 70.4,57.6 71.2,57.6 66.8,58.4 67.6,58.4 68.4,58.4 69.2,58.4 70,58.4 70.8,58.4 71.6,58.4 72.4,58.4 66.4,59.2 67.2,59.2 68,59.2 68.8,59.2 69.6,59.2 70.4,59.2 71.2,59.2 72,59.2 72.8,59.2 73.6,59.2 66,60 66.8,60 67.6,60 68.4,60 69.2,60 70,60 70.8,60 71.6,60 72.4,60 73.2,60 74,60 73.6,60.8 68.4,61.6 71.6,61.6 74,61.6 65.6,62.4 65.6,64 66,64.8 73.2,64.8 74,64.8 72.8,65.6 73.6,65.6 64.8,68.8 65.6,68.8 66.4,68.8 67.2,68.8 72.8,68.8 73.6,68.8 74.4,68.8 75.2,68.8
GPS_3.3_CTRL: G_C.0 R16.1 U1.17 U5.5 | length 13
  Component Side w0.127: G_C.0 69.6,48.4 v1(69.8,48.2) R16.1 71.2,48.2 71.502,48.502 U1.17
  Solder Side w0.127: U5.5 63.4,51.6 64.9,50.1 68.2,50.1 69.8,48.5 v1(69.8,48.2)
GPS_EXT_INT: G_INT.0 U1.31 U3.5 | length 8.9
  Component Side w0.127: U1.31 77.66,49.442 v1(78.529,49.442)
  Solder Side w0.127: U3.5 73.3,52.4 73.9,51.8 ; G_INT.0 73.8,51.8 73.9,51.8 ; v1(78.529,49.442) 78.506,49.42 76.28,49.42 73.9,51.8
GPS_IN: Antenna.SIG L3.2 U9.3 | length 3.9
  Solder Side w0.2: L3.2@67.1,65.8 67.14,65.84 U9.3 68.11,66.31 69.3,67.5 Antenna.SIG@70,67.5
GPS_TIMEPULSE: G_TPLS.0 U1.32 U3.4 | length 9
  Component Side w0.127: U1.32 77.602,50 v1(78.9,50)
  Solder Side w0.127: U3.4 74.4,51.7 75.3,50.8 ; G_TPLS.0 75.3,50.8 ; v1(78.9,50) 78.3,50 78,49.7 76.4,49.7 75.3,50.8
I2C1_SCL: R11.1 SCL.0 U1.33 U3.17 U8.8 | length 24.6
  Component Side w0.127: U1.33 81.802,50.502 82.25,50.95 R11.1 82.25,51.65 82.9,52.3 82.9,56.2 ; SCL.0 82.9,56.2 ; U8.8@83.4,58.5 U8.8 ; v1(84.1,59.3) 83.425,58.625 U8.8 ; 82.9,56.2 82.9,58.125 U8.8
  Solder Side w0.127: U3.17 76.6,60.859 77.815,59.645 83.184,59.645 83.529,59.3 v1(84.1,59.3)
I2C1_SDA: R12.1 SDA.0 U1.34 U3.16 U8.7 | length 28
  Component Side w0.127: U1.34 81.102,51.002 81.35,51.25 R12.1 80.7,52.25 80.7,53.3 82.6,55.2 82.6,56.2 ; SDA.0 82.6,56.2 ; v1(84.2,58.6) 84.6,59 84.6,59.6 84.325,59.875 U8.7 83.275,59.875 82.6,59.2 82.6,56.2
  Solder Side w0.127: U3.16 75.5,61.6 77.709,59.391 83.079,59.391 83.87,58.6 v1(84.2,58.6)
L1_3.3_CTRL: L13C.0 U1.24 U7.5 | length 15.8
  Component Side w0.127: v1(74.8,45.5) 74.8,46.1 75.155,46.455 75.155,46.659 75.35,46.855 U1.24
  Solder Side w0.127: 74.7,44.7 L13C.0 ; v1(74.8,45.5) 74.681,45.5 74.64,45.54 74.64,41.76 74.79,41.61 76.4,41.61 76.41,41.6 76.677,41.6 76.836,41.759 77.082,41.759 77.323,42 79.5,42 81.4,40.1 81.4,39.4 81.525,39.275 U7.5@82.3,39.275
L1_5.0_CTRL: L15C.0 U1.23 U6.5 | length 18.1
  Component Side w0.127: v1(73.3,45.1) 73.5,45.1 74.44,46.04 74.44,46.34 74.85,46.75 U1.23
  Solder Side w0.127: v1(73.3,45.1) 73.682,45.1 74.694,46.112 74.694,46.194 76.994,48.494 78.602,48.494 78.604,48.492 78.92,48.492 78.922,48.494 79.329,48.494 79.64,48.182 79.64,47.817 79.323,47.5 78.9,47.5 78.6,47.2 78.6,45.8 79.6,44.8 80.6,44.8 81.2,45.4 U6.5 ; 79.3,48.5 79.6,48.8 L15C.0
LED: D1.A U1.20 | length 15.7
  Component Side w0.127: 75.6,36.6 75.925,36.275 D1.A@76.5,36.275
  Component Side w0.15: v1(73,40.4) 73.3,40.4 74.2,41.3 v1(74.2,42) ; v1@73.202,46.502 v1(73.1,46.4) 73.1,46.617 73.3,46.817 U1.20@73.3,47.3 ; U1.20@73.3,47.302 U1.20 ; v1(74.2,39.5) 74.4,39.5 74.9,39 74.9,38.439 75.6,37.739 75.6,36.6
  Solder Side w0.15: v1(73,40.4) 73.9,39.5 v1(74.2,39.5) ; v1(73.1,46.4) 72.696,46.4 72.148,45.852 72.148,43.752 73.9,42 v1(74.2,42)
MCU_RX_GPS_TX: G_TX.0 U1.22 U3.2 | length 15
  Component Side w0.127: v1(74,46.4) 74.06,46.4 74.069,46.409 74.078,46.4 74.35,46.672 U1.22
  Solder Side w0.127: v1(74,46.4) 74,47.1 74.85,47.95 ; G_TX.0 74.85,47.95 ; U3.2 76.6,51.359 77.265,50.694 79.188,50.694 79.594,50.288 79.594,49.526 78.817,48.748 75.648,48.748 74.85,47.95
MCU_TX_GPS_RX: G_RX.0 U1.21 U3.3 | length 16.8
  Component Side w0.127: v1(73.5,45.8) 73.54,45.84 73.54,46.682 73.708,46.85 73.85,46.85 U1.21
  Solder Side w0.127: v1(73.5,45.8) 73.5,46.158 73.559,46.217 73.559,47.019 74.57,48.03 ; G_RX.0 74.3,48.3 74.57,48.03 ; U3.3 75.5,52.1 77.16,50.44 79.082,50.44 79.34,50.182 79.34,49.64 78.97,49.27 78.97,49.26 78.712,49.002 75.543,49.002 74.57,48.03
NetBOOT_2: BOOT.2 R14.2 | length 6.7
  Component Side w0.127: BOOT.2 60.075,63 R14.2
NetC14_2: C14.2 R3.1 U5.6 | length 2.9
  Solder Side w0.2: C14.2 60.375,54.025 R3.1 62.35,53.3 U5.6
NetC15_2: C15.2 R5.1 U6.6 | length 3.5
  Solder Side w0.3: U6.6 82.15,46.55 R5.1 82.475,47.575 C15.2
NetC16_2: C16.2 R7.1 U7.6 | length 3.5
  Solder Side w0.15: C16.2 82.275,38.3 U7.6@82.3,38.325 ; U7.6 82.35,38.3 R7.1
NetC20_1: C20.1 U8.2 | length 1.1
  Component Side w0.3: C20.1 81.375,61.1 U8.2
NetD1_K: D1.K R13.1 | length 1.3
  Component Side w0.15: R13.1 75.6,38.825 D1.K
NetL2_1: L2.1 U9.4 | length 1.3
  Solder Side w0.2: U9.4 71.34,65.84 L2.1@71.5,66
NetL2_2: L2.2 U9.5 | length 1.4
  Solder Side w0.2: U9.5@70.3,65.3 71.32,65.3 L2.2
NetQ1_1: Q1.1 R2.2 | length 1.2
  Component Side w0.127: R2.2 Q1.1
NetR4_2: R4.2 U5.1 | length 1.3
  Solder Side w0.2: U5.1 62.45,56.85 R4.2
NetR6_2: R6.2 U6.1 | length 1.4
  Solder Side w0.3: U6.1 82.3,43.05 R6.2
NetR8_2: R8.2 U7.1 | length 2
  Solder Side w0.3: R8.2@79.275,36.575 79.275,37.675 U7.1
NetR9_2: R9.2 WAKE.2 | length 2.4
  Component Side w0.2: WAKE.2@62.175,37.675 62.8,38.3 v1(63.4,38.3)
  Solder Side w0.2: v1(63.4,38.3) R9.2
NRST: C18.2 NRST.0 RST.2 SWD.10 U1.4 | length 45.6
  Component Side w0.127: C18.2 61.375,61 RST.2 62.275,60.425 63.45,59.25 ; 63.43,59.23 63.45,59.25 ; v1(63.6,59.5) 63.6,59.4 63.45,59.25 ; v1(69,50.7) 68.8,50.7 67.316,52.184 67.316,56.784 67.3,56.8 ; v1(70,43.3) 70.1,43.3 v1(71.1,42.3) ; U1.4 75.35,53.35 73.9,54.8 73.9,57.238 73.838,57.3 72.577,57.3 72.077,56.8 67.3,56.8 ; 63.45,59.25 64.5,58.2 65.9,58.2 67.3,56.8
  Solder Side w0.127: NRST.0 63.2,59.9 v1(63.6,59.5) ; v1(69,50.7) 69.5,50.7 70.051,50.149 70.051,49.207 70.359,48.9 70.359,43.459 70.2,43.3 v1(70,43.3) ; v1(71.1,42.3) 71.382,42.3 72.5,41.182 SWD.10@72.5,38
OSC_IN: C6.2 U1.2 X1.3 | length 5.7
  Component Side w0.127: U1.2 76.35,55.35 77.675,56.675 78.527,56.675 C6.2@78.8,56.402
OSC_OUT: C5.2 U1.3 X1.1 | length 3.8
  Component Side w0.127: C5.2 75.148,55.502 75.525,55.125 75.85,54.8 U1.3
RF_IN: U3.11 U9.6 | length 2.1
  Solder Side w0.2: U3.11 70,64 70.3,64.3 U9.6@70.3,64.8
SHIELD: J3.5
SPI1_MISO: J2.17 MISO.0 U1.13 | length 18.7
  Component Side w0.127: v1(71,50.3) 71.2,50.3 71.402,50.502 U1.13 ; v1(76.9,40.2) 76.95,40.25 J2.17
  Solder Side w0.127: v1(71,50.3) 71.064,50.3 71.44,49.924 71.44,49.417 71.375,49.352 71.375,43.385 73.911,40.848 75.929,40.848 76.318,40.459 76.641,40.459 v1(76.9,40.2) 77.5,39.6 MISO.0
SPI1_MOSI: J2.18 MOSI.0 U1.14 | length 18.7
  Component Side w0.127: v1(71,49.6) 71.258,49.6 71.661,50.002 U1.14 ; v1(76.4,39.8) 76.45,39.75 J2.18
  Solder Side w0.127: v1(71,49.6) v1@71,49.741 ; v1@71,49.741 71,49.336 71.121,49.216 71.121,43.279 73.806,40.594 75.606,40.594 v1(76.4,39.8) 76.44,39.76 76.963,39.76 77.6,39.123 MOSI.0
SPI1_NSS: CS.0 J2.15 U1.11 | length 19.7
  Component Side w0.127: 71.223,51.579 v1@71.1,51.702 ; U1.11 72.061,51.54 71.061,51.54 71,51.602 v1@71.1,51.702 ; v1(77,41.3) 77.05,41.25 J2.15 ; v1@71.1,51.702 v1(71.1,51.9) v1@71.1,51.702
  Solder Side w0.127: v1(71.1,51.9) 71.1,51.7 71.259,51.54 71.282,51.54 72,50.823 72,49 71.883,48.883 71.883,43.595 74.121,41.356 76.295,41.356 76.311,41.34 76.96,41.34 v1(77,41.3) 77.2,41.5 CS.0
SPI1_SCK: J2.16 SCK.0 U1.12 | length 18.8
  Component Side w0.127: v1(71.1,51.1) 71.1,50.925 v1@71.023,51.002 ; U1.12 v1@71.023,51.002 ; v1(76.5,40.9) 76.65,40.75 J2.16 ; v1@71.023,51.002 71,51.025 70.977,51.002 v1@71.023,51.002
  Solder Side w0.127: v1(71.1,51.1) 71.1,50.9 71.7,50.3 71.7,49.059 71.629,48.988 71.629,43.49 74.016,41.102 76.189,41.102 76.446,40.846 v1@76.45,40.85 ; v1@76.4,40.9 v1@76.45,40.85 ; v1(76.5,40.9) v1@76.45,40.85 ; SCK.0 77.586,40.713 76.586,40.713 v1@76.45,40.85
SWCLK: SWD.4 U1.28 | length 15.7
  Component Side w0.127: SWD.4@68.67,38.3 69.724,39.354 73.013,39.354 75.219,41.559 75.659,41.559 v1(76.2,42.1) ; v1@77.6,47.5 v1(77.5,47.5) 77.5,47.902 U1.28
  Solder Side w0.127: v1(76.2,42.1) 76.2,42.3 77.1,43.2 77.1,47.1 v1(77.5,47.5)
SWDIO: SWD.2 U1.25 | length 16.2
  Component Side w0.127: SWD.2@67.4,38.3 68.708,39.608 72.908,39.608 75.3,42 v1(75.3,42.1) ; v1(75.7,46.5) 75.85,46.65 U1.25
  Solder Side w0.127: v1(75.3,42.1) 75.577,42.1 76.8,43.323 76.8,45.7 76,46.5 75.977,46.477 75.954,46.5 v1(75.7,46.5)
SYNC_IN: J2.20 SI.0 U1.29 | length 14.1
  Component Side w0.127: U1.29 78.298,48.502 78.659,48.141 78.659,47.917 79.236,47.34 79.882,47.34 80.141,47.082 80.141,46.718 79.6,46.177 79.6,44.6 79.84,44.36 79.84,39.24 79.35,38.75 J2.20@78.4,38.75 ; J2.20 J2.20@78.4,38.75 ; J2.20@78.4,38.8 J2.20@78.4,38.75 ; 79.8,47.34 79.84,47.34 SI.0
SYNC_OUT: J2.19 SO.0 U1.8 | length 23.8
  Component Side w0.127: v1(69.9,51.4) 70.127,51.627 70.127,52.468 71.027,53.367 73.133,53.367 73.35,53.15 U1.8 ; v1(76.8,39.3) 76.85,39.25 J2.19
  Solder Side w0.127: v1(69.9,51.4) 69.9,51.2 70.559,50.54 70.559,49.417 70.867,49.11 70.867,43.174 73.7,40.34 75.16,40.34 76.2,39.3 ; SO.0 75.8,38.9 76.2,39.3 ; v1(76.8,39.3) 76.2,39.3
TRACESWO: SWD.6 U1.30 | length 17.9
  Component Side w0.127: SWD.6@69.94,38.3 70.74,39.1 73.118,39.1 75.324,41.305 76.205,41.305 76.9,42 v1(76.9,42.2) ; U1.30 78.698,49.002 79.2,48.5 v1(79.2,48)
  Solder Side w0.127: v1(76.9,42.2) 76.9,42.6 77.4,43.1 77.4,46.4 79,48 v1(79.2,48)
USART1_DE: DE.0 U1.16 U4.3 | length 24.2
  Component Side w0.127: U4.3@57.8,57.325 DE.0 ; U4.3 57.815,55.985 58.054,55.746 60.805,55.746 62.2,57.141 65.482,57.141 66.3,56.323 66.3,51.699 69.094,48.905 71.546,48.905 71.643,49.002 U1.16
USART1_RX: RX.0 U1.10 U4.1 | length 21.2
  Component Side w0.127: U4.1 60.355,58.755 60.5,58.9 61.5,58.9 62.751,57.649 65.693,57.649 66.808,56.533 66.808,51.91 68.712,50.006 69.488,50.006 70.66,51.177 70.66,51.184 70.659,52.082 70.918,52.34 71.761,52.34 U1.10
USART1_TX: TX.0 U1.9 U4.4 | length 27.4
  Component Side w0.127: TX.0 56.5,58.9 56.55,58.85 ; U4.4 56.545,58.845 56.55,58.85 ; U1.9 72.502,53.1 71.118,53.1 70.405,52.387 70.405,51.282 69.382,50.26 68.818,50.26 67.062,52.015 67.062,56.639 65.798,57.903 64.397,57.903 62.709,59.591 57.291,59.591 56.55,58.85
VCC_RF: C23.2 U3.14 U9.1 | length 13.7
  Solder Side w0.2: U9.1 67.3,63.95 C23.2 67.3,63.8 67.2,63.9 66.6,63.9 66.2,63.5 66.2,61.3 66.8,60.7 72.2,60.7 73.3,61.8 U3.14 U3.14@73.3,62.9
VIN: J3.2 Q1.3 Vin.0 | length 8.2
  Component Side w0.5: J3.2@60.9,40.5 61,40.4 Vin.0
  Component Side w1: J3.2 60.95,42.85 61.7,43.6 Q1.3
WKUP: C17.2 R9.1 R10.2 U1.7 WKUP.0 | length 25.3
  Component Side w0.127: v1(69.5,52.1) 69.5,52.2 70.921,53.621 73.379,53.621 73.85,53.15 U1.7
  Solder Side w0.127: WKUP.0 C17.2 ; R10.2 65.5,40 66.1,40.6 68.416,40.6 70.613,42.796 70.613,49.005 70.305,49.312 70.305,50.372 69.46,51.218 69.46,52.059 v1(69.5,52.1)
  Solder Side w0.2: C17.2 R10.2
pads on no net: F1.1 F2.1 F3.1 F4.1 J2.25 J2.26 J2.S0 J2.S1 SWD.7 SWD.8 U1.37 U1.ThermalPaste U3.9 U3.15 U3.18 U8.5 U8.6 U9.PASTE WAKE. WAKE.SHIELD

## Polygon pours and split planes (outlines as drawn)
GND_RF on Solder Side "GND_RF_L04_P002" (solid, pour order 2): 67.55,56.45 71.95,56.45 75,59.5 75,66.5 76.5,66.5 76.5,69.5 72.3,69.5 72.3,64 70.5,64 70.5,63 69.5,63 69.5,64 69.5,66 67.7,66 67.7,69.5 63.5,69.5 63.5,66 65,66 65,59
GND_RF on Component Side "GND_RF_L01_P004" (solid, pour order 4): 67.5,56.5 72,56.5 75,59.5 75,64 75,66.5 76.5,66.5 76.5,69.5 72.3,69.5 72.3,64 67.7,64 67.7,69.5 63.5,69.5 63.5,66 65,66 65,59
GND on GND "GND_L02_P006" (solid, remove dead copper, pour order 6): 63,35.5 63,37 57,37 57,35.5 56,35.5 55.5,36 55.5,69 56,69.5 63.5,69.5 63.5,66 65,66 65,59 67.5,56.5 72,56.5 75,59.5 75,64 75,66.5 76.5,66.5 76.5,69.5 84,69.5 84.5,69 84.5,36 84,35.5
+3.3 on +3.3 "+3.3_L03_P010" (solid, remove dead copper, pour order 10): 55.5,69 56,69.5 63.5,69.5 63.5,66 65,66 65,59 67.5,56.5 72,56.5 75,59.5 75,66.5 76.5,66.5 76.5,69.5 84,69.5 84.5,69 84.5,36 84,35.5 63,35.5 63,37 57,37 57,35.5 56,35.5 55.5,36 55.5,69

## Silkscreen, mask and mechanical layers (free items; w line width, h text height)
Top Overlay:
  text "SixAx v1.0" at 76.1,65.7 h0.8
  text "20150917" at 76.1,64.7 h0.8
  text "naniBox.com" at 76.1,63.7 h0.8
  text "Shield" at 57.6,45.3 h0.8 r90
  text "A/Y" at 58.7,45.3 h0.8 r90
  text "B/Z" at 60,45.3 h0.8 r90
  text "Vin" at 61.3,45.3 h0.8 r90
  text "GND" at 62.6,45.2 h0.8 r90
Bottom Overlay:
  rectangle: 55.75,41.75 63.5,50.8
  lines w0.15: 75.2,38.3 75.2,38.5 75.4,38.7 ; 77.4,39.5 77.6,39.3 77.6,39 ; 77.4,40.2 77.8,39.8 78.3,39.8 ; 77.4,41.3 77.6,41.3 77.8,41.1 77.8,40.9 ; 77.4,42.2 77.4,42.1 77.9,41.6 78.1,41.6 78.2,41.6 ; 78.3,38.3 78.3,38.5 78.5,38.7 78.6,38.7
  text "SWDIO" at 67,38.8 h0.8 r270
  text "SWCLK" at 68.3,38.8 h0.8 r270
  text "SWO" at 69.6,38.8 h0.8 r270
  text "NSRT" at 72.2,38.8 h0.8 r270
Mechanical 1:
  lines w0.1: 56.1,35 56,35 55,36 55,69 56,70 62.3,70 77.7,70 84,70 85,69 85,36 84,35 63.7,35
Mechanical 28:
  circle w0.15: c70,68.8 r6.701
  lines w0.01: 40.5,35 90,35 90,60 ; 50,35 50,60 ; 55,35 55,57.5 ; 60,35 60,60 ; 65,35 65,57.5 ; 70,40 92.5,40 ; 70,45 95,45 ; 70,50 92.5,50 ; 70,55 95,55 ; 70,65 95,65 ; 70,70 92.5,70 ; 70,75 95,75 ; 70,84.5 70,35 ; 75,35 75,57.5 ; 80,35 80,60 ; 85,35 85,57.5 ; 92.5,60 70,60 70,35 ; 95,35 70,35
  lines w0.1: 57,62.5 58,62.5 ; 57.5,62 57.5,63 ; 60.3,62.5 61.3,62.5 ; 60.8,62 60.8,63 ; 55.5,39.3 55.5,45.1 63.9,45.1 63.9,39.3 55.5,39.3 ; 64.5,31 64.5,35 64.5,39.5 67,42 67,44.5 69.5,47 70.5,47 73,44.5 73,42 75.5,39.5 75.5,35 75.5,31 75,30.5 65,30.5 64.5,31
  lines w0.15: 80.5,41 81.5,41 ; 81,40.5 81,41.5 ; 56,35 56,35 ; 56,35 55,36 55,69 56,70 84,70 85,69 85,36 84,35 62.5,35 62.5,36.6 62.4,36.7 57.4,36.7 57.3,36.6 57.3,35 56,35
  text "40mm" at 95,75 h0.8
  text "20mm" at 50,60 h0.8 r90
  text "10mm" at 60,60 h0.8 r90
  text "10mm" at 80,60 h0.8 r90
  text "20mm" at 90,60 h0.8 r90
  text "30mm" at 76.509,59.7 h0.8
  text "0mm" at 74.809,59.05 h0.8 r90
  text "20mm" at 76.509,49.7 h0.8
  text "10mm" at 95,45 h0.8
  text "0mm" at 95,35 h0.8

## Text inside footprints (layer, text, board x,y; h text height)
U3: Bottom Overlay "RF" at 71.8,60.1 h0.8 r90; Top Overlay "RF" at 71.8,58.6 h0.8 r90